# Altium PCB 遥控2.0.PcbDoc
Units mm, origin at the board's own origin, x right, y up, seen from the top; angles counter-clockwise.
Board outline 30 x 35 mm, 2 copper layers (Top Layer, Bottom Layer); 38 components, 17 nets, 107 pads, 20 vias.
Unrouted connection lines stored in the file: 22.
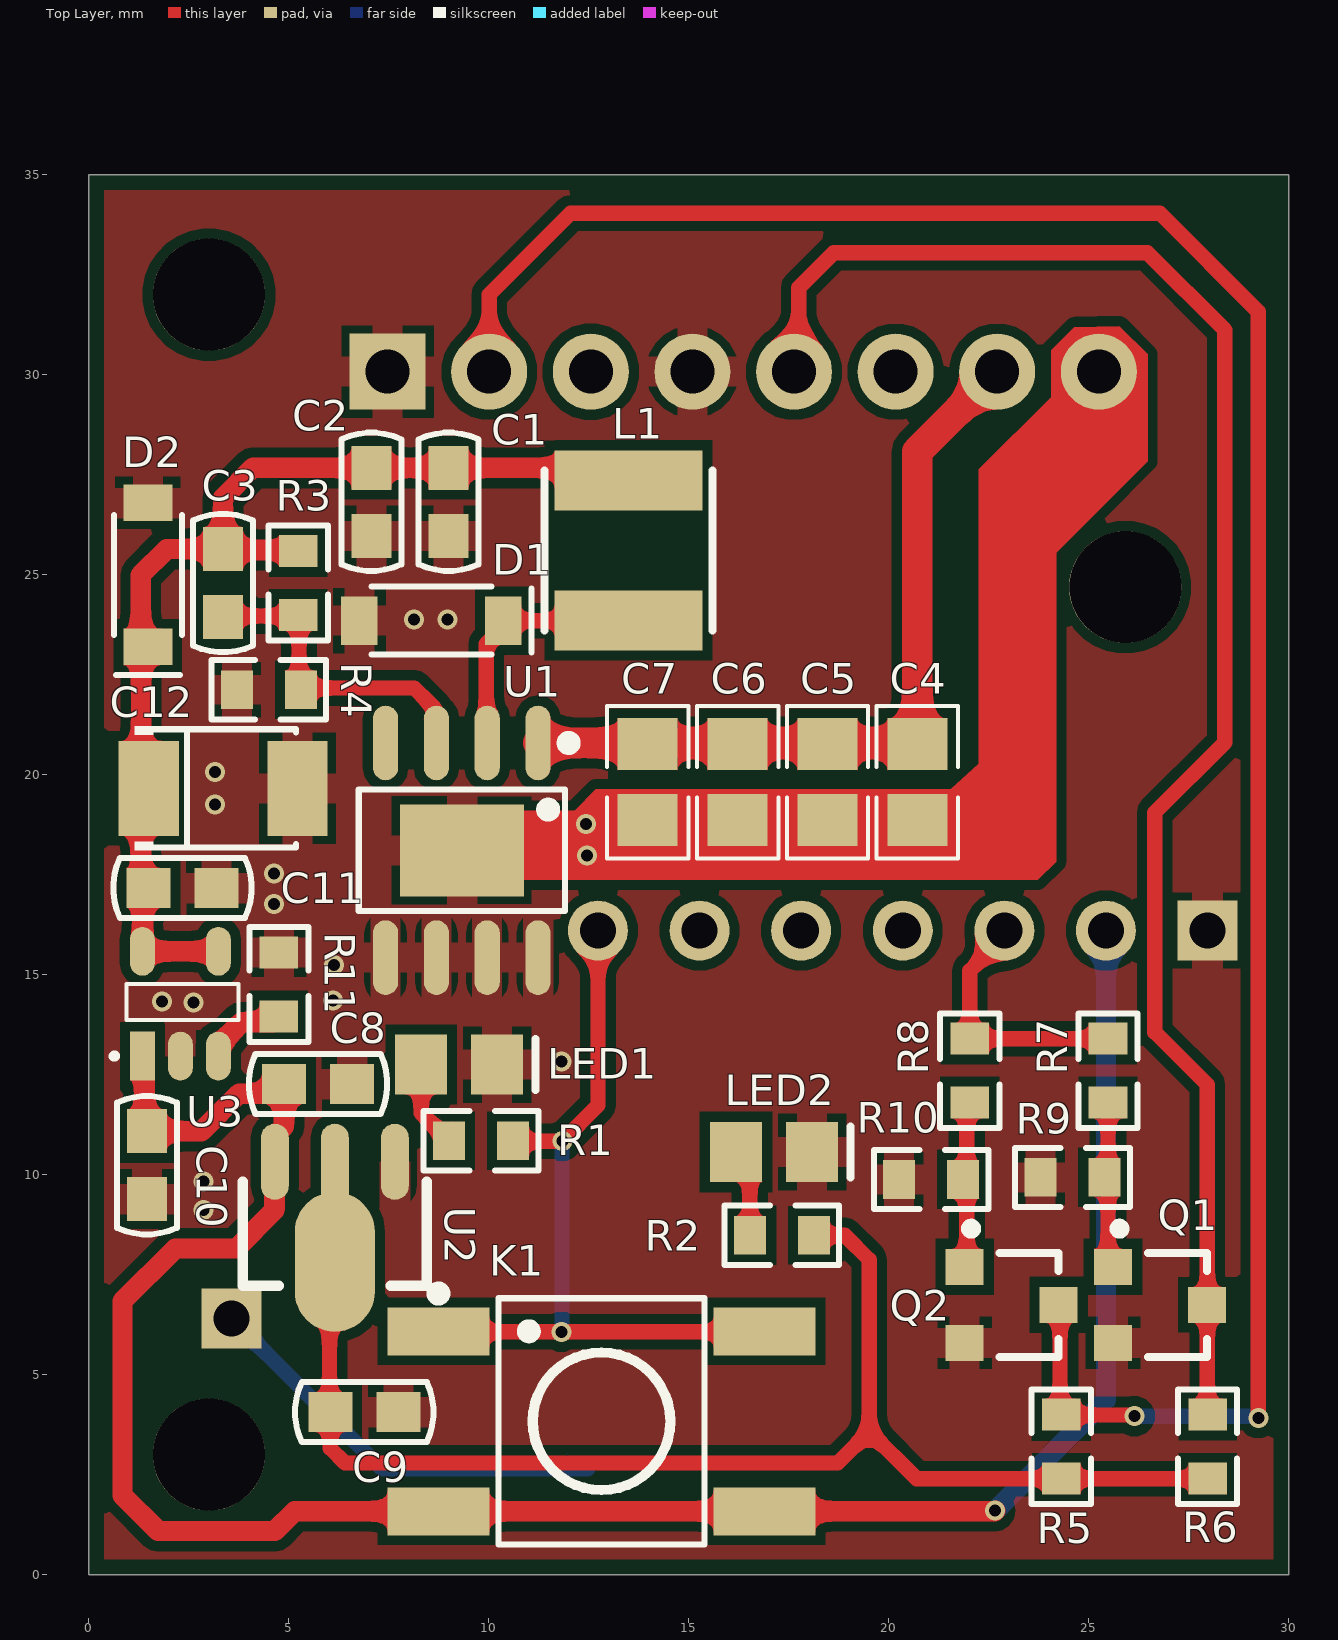
[diagram p0: Top Layer view]
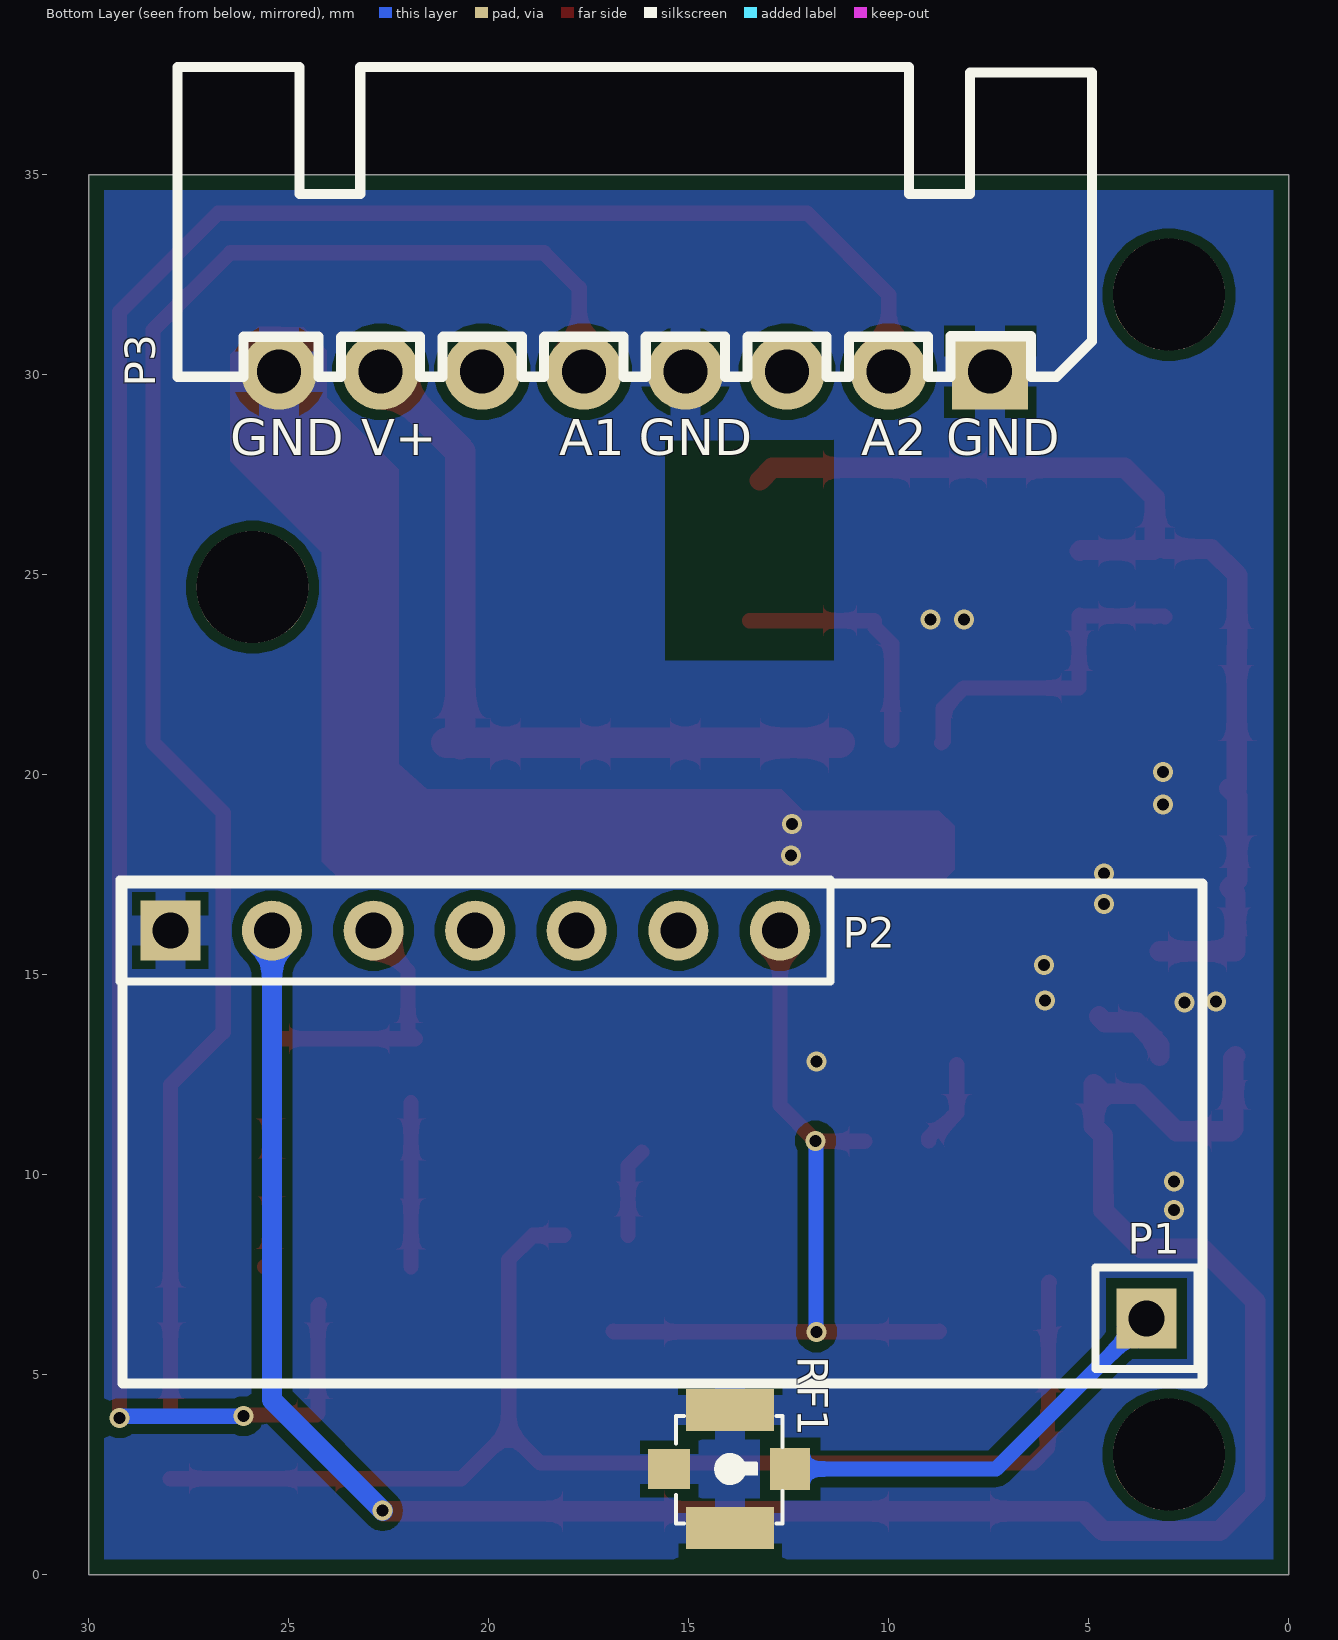
[diagram p1: Bottom Layer view, seen from below]
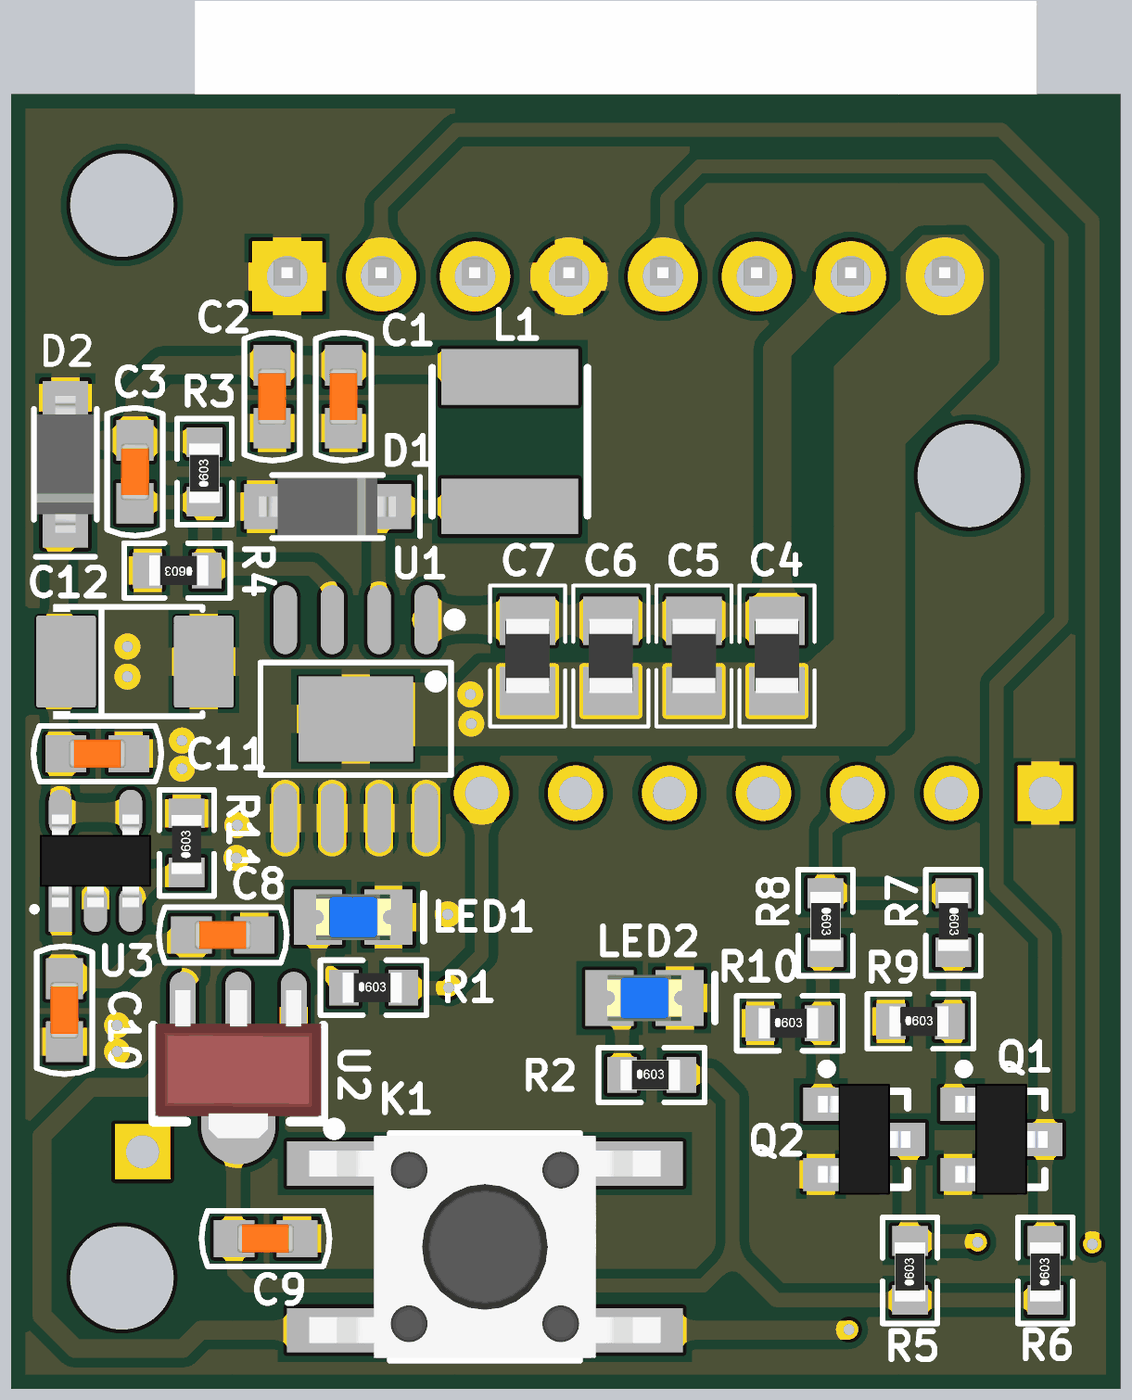
[diagram p2: 3D render of the assembled board from above, using the file's embedded part models]

## Layer stack, top to bottom
Top Solder: solder mask 0.0102, Solder Resist, Dk 3.5
Top Layer: signal copper 0.0356
Dielectric 1: dielectric 0.32, FR-4, Dk 4.8
Bottom Layer: signal copper 0.0356
Bottom Solder: solder mask 0.0102, Solder Resist, Dk 3.5

## Board outline
0,0 0,35 30,35 30,0

## Design rules (kind name [scope] priority, off if disabled: settings)
BoardOutlineClearance [All] p1: gap=0.381 ignorepadtopadclearanceinfootprint=FALSE
Clearance [All] p1: gap=0.254 ignorepadtopadclearanceinfootprint=FALSE except(0: Arc-Hole Track-Hole SMDPad-Hole THPad-Hole Via-Hole Fill-Hole Poly-Hole Region-Hole Text-Hole)
PolygonConnect [All] p1: thpad.connectstyle=Relief thpad.reliefconductorwidth=0.762 thpad.reliefentries=4 thpad.polygonreliefangle="90 Angle" thpad.airgapwidth=0.203 smdpad.connectstyle=Relief smdpad.reliefconductorwidth=0.762 smdpad.reliefentries=4 smdpad.polygonreliefangle="90 Angle" smdpad.airgapwidth=0.203 via.connectstyle=Direct via.reliefconductorwidth=0.762 via.reliefentries=4 via.polygonreliefangle="90 Angle" via.airgapwidth=0.203
RoutingVias [All] p1: holewidth=0.3 width=0.5 viastyle="Through Hole" minholewidth=0.3 minwidth=0.5 maxholewidth=0.3 maxwidth=0.5
SolderMaskExpansion [All] p1: expansion=0.102 istentingtop=FALSE
Width [All] p1: maxlimit=0.762 minlimit=0.254 preferedwidth=0.254
30 further rules are at their usual default settings.

## Components (designator, comment, footprint, x,y, rotation, side; value= is the part's Value field where it differs from the comment)
C1 "1uF" CAP-0603 8.992,26.822 r90 top
C2 "100nF" CAP-0603 7.061,26.822 r90 top
C3 "33nF" CAP-0603 3.353,24.79 r90 top
C4 "10uF" 0805 20.711,19.812 r90 top
C5 "10uF" 0805 18.464,19.812 r90 top
C6 "100nF" 0805 16.217,19.812 r90 top
C7 "10nF" 0805 13.97,19.812 r90 top
C8 "10uF" CAP-0603 5.729,12.268 r180 top
C9 "10uF" CAP-0603 6.883,4.064 r180 top
C10 "10uF" CAP-0603 1.448,10.236 r90 top
C11 "10uF" CAP-0603 2.337,17.17 r180 top
C12 "TAJB107M010RNJ" CASE-B_3528 3.353,19.66 r0 top
D1 "S210" SOD-123 8.56,23.851 r0 top
D2 "BZT52C5V1" SOD-123 1.473,24.994 r270 top
K1 "SW-PB" SW-SMD_4P-L6.0-W6.0 12.814,3.835 r0 top locked
L1 "47uH" IND-SMD_L4.0-W4.0_FNR4012S 13.487,25.603 r270 top
LED1 "LED" LED_0805 9.256,12.751 r0 top locked
LED2 "LED" LED_0805 17.13,10.566 r0 top locked
P1 "Plug" HEADER_1 3.56,6.408 r0 bottom
P2 "Header 7" HDR1X7 27.965,16.104 r180 bottom
P3 "Header 8" XH2.54-W-8P 16.358,30.074 r0 bottom
Q1 "SS8050" SOT-23 26.778,6.746 r270 top
Q2 "SS8050" SOT-23 23.07,6.746 r270 top
R1 "1K" "0603 - duplicate1" 9.804,10.846 r0 top
R2 "1K" "0603 - duplicate1" 17.323,8.484 r0 top
R3 "10K" "0603 - duplicate1" 5.232,24.79 r90 top
R4 "3.3K" "0603 - duplicate1" 4.496,22.123 r180 top
R5 "4.7K" "0603 - duplicate1" 24.308,3.2 r90 top value=10K
R6 "4.7K" "0603 - duplicate1" 27.965,3.2 r90 top value=10K
R7 "1K" "0603 - duplicate1" 25.476,12.598 r270 top value=10K
R8 "1K" "0603 - duplicate1" 22.022,12.598 r270 top value=10K
R9 "10K" "0603 - duplicate1" 24.587,9.931 r0 top
R10 "10K" "0603 - duplicate1" 21.057,9.881 r0 top
R11 "6.8k" "0603 - duplicate1" 4.75,14.757 r90 top
RF1 "6GHz" CONN-SMD_GT-RF1125A-01G 13.981,2.642 r90 bottom
U1 "XL7005A" SOIC-8_L4.9-W3.9-P1.27-LS6.0-BL-EP3.1-1 9.322,18.11 r180 top
U2 "AMS1117-3.3" SOT89 6.147,9.073 r90 top
U3 "SY6280AAC" SOT-23-5 2.286,14.275 r90 top

## Footprints (in the part's own frame and the unit in brackets; to place one, negate y for a bottom-side part, rotate by r counter-clockwise, add the part's x,y. Pads: shape width x height; smd on the part's side, far side on the other; paste and mask are expansions set on the pad)
"0603 - duplicate1" [mm] "贴片带丝印"
  rect 0.8x0.965 smd: 1(-0.8,0) 2(0.8,0)
  silkscreen extent -1.43,-0.74 1.44,0.74, body extent -0.84,-0.41 0.76,0.41, height 0.45
0805 [mm] "贴片带丝印"
  rect 1.3x1.5 smd: 1(-0.95,0) 2(0.95,0)
  silkscreen extent -1.91,-1.02 1.91,1.02, body extent -1,-0.6 1,0.6, height 0.85
CAP-0603 [mm] "贴片电容"
  rect 1.1x1 smd: 1(-0.85,0) 2(0.85,0)
  silkscreen extent -1.73,-0.75 1.73,0.75, body extent -0.76,-0.38 0.76,0.38, height 0.78
CASE-B_3528 [mm]
  rect 1.506x2.376 smd paste+0.051: 1(-1.861,0) 2(1.861,0)
  silkscreen extent -2.21,-1.55 1.83,1.55
CONN-SMD_GT-RF1125A-01G [mm]
  rect 1.05x2.2 smd paste+0 mask+0.05: 1(-1.475,-0.012) 3(1.475,-0.012)
  rect 1x1.05 smd paste+0 mask+0.05: 2(0,1.513)
  rect 1.05x1 smd paste+0 mask+0.05: 4(0,-1.513)
  silkscreen extent -1.36,-1.32 1.33,1.35
HDR1X7 [mm] "Connector; Header; 7 Position"
  rect 1.5x1.5 hole 0.9: 1(0,0)
  round 1.5 hole 0.9: 2(2.54,0) 3(5.08,0) 4(7.62,0) 5(10.16,0) 6(12.7,0) 7(15.24,0)
  silkscreen extent -1.27,-1.27 16.51,1.27
HEADER_1 [mm] "2.54排针-3x1"
  rect 1.5x1.5 hole 0.9: 1(0,0)
  silkscreen extent -1.27,-1.27 1.27,1.27
IND-SMD_L4.0-W4.0_FNR4012S [mm]
  rect 1.5x3.7 smd: 1(-1.75,0) 2(1.75,0)
  silkscreen extent -2,-2.1 2,2.1
LED_0805 [mm] "贴片二极管"
  rect 1.3x1.5 smd: 1(-0.95,0) 2(0.95,0)
  silkscreen extent 1.91,-0.64 1.91,0.64, body extent -1.01,-0.62 1.01,0.62, height 1.1
SOD-123 [mm]
  rect 0.91x1.22 smd: 1(-1.8,0) 2(1.8,0)
  silkscreen extent -1.5,-0.85 2.5,0.85, body extent -1.85,-0.77 1.85,0.78, height 1.18
SOIC-8_L4.9-W3.9-P1.27-LS6.0-BL-EP3.1-1 [mm]
  oval 0.63x1.865 smd: 1(-1.905,-2.683) 2(-0.635,-2.683) 3(0.635,-2.683) 4(1.905,-2.683) 5(1.905,2.682) 6(0.635,2.682) 7(-0.635,2.682) 8(-1.905,2.682)
  rect 3.1x2.3 smd paste+0 mask+0.05: 9(0,0)
  silkscreen extent -2.82,-2.83 2.58,1.52
SOT89 [mm] "SOT89封装"
  oval 1.9x0.7 smd: 1(1.25,-1.5) 3(1.25,1.5)
  oval 3.5x2 smd: 2(-1.25,0)
  oval 2.1x0.7 smd: 2(1.151,0)
  silkscreen extent -1.85,-2.3 0.75,2.3, body extent -2.3,-2.25 1.7,2.25, height 1.5
SOT-23 [mm]
  rect 0.9x0.95 smd: 1(-0.95,-1.175) 2(0.95,-1.175) 3(0,1.175)
  silkscreen extent -2.03,-1.14 1.3,1.18, body extent -1.5,-1.25 1.5,1.25, height 1.15
SOT-23-5 [mm] "SOT23封装-5引脚贴片"
  rect 1.22x0.62 smd: 1(-1.31,0.95)
  oval 1.22x0.62 smd: 2(-1.31,0) 3(-1.31,-0.95) 4(1.31,-0.95) 5(1.31,0.95)
  silkscreen extent -1.32,-1.45 0.49,1.66, body extent -1.25,-1.5 1.25,1.5, height 1.08
SW-SMD_4P-L6.0-W6.0 [mm]
  rect 2.55x1.2 smd: 1(-4.075,2.25) 1(4.075,2.25) 2(-4.075,-2.25) 2(4.075,-2.25)
  silkscreen extent -4.22,-3.08 2.57,3.34, body extent -4.75,-3 4.75,3, height 7.42
XH2.54-W-8P [mm] "接插件，8P"
  rect 1.9x1.9 hole 1.1: 1(-8.89,0)
  round 1.9 hole 1.1: 2(-6.35,0) 3(-3.81,0) 4(-1.27,0) 5(1.27,0) 6(3.81,0) 7(6.35,0) 8(8.89,0)
  silkscreen extent -11.43,-7.62 11.43,0.13, body extent -11.4,-7.45 11.38,0.25, height 2.89

## Part data
C1 C2 C3 C4 C5 C6 C7 C8 C9 C10 C11: library part Cap, "无极性电容", LatestRevisionDate=17-Jul-2002, LatestRevisionNote="Re-released for DXP Platform.", PackageReference=RAD-0.3, Published=8-Jun-2000, Publisher="Altium Limited"
C12: library part JVJ10V100M5X5, "100uF", Symbol=100uf
D1: library part B340A, LCSC Assembly=Yes, Manufacturer=MDD, image=//image.lceda.cn/szlcsc/C64982.jpg, Manufacturer Part=B340A, SMT Type=Extend, spicePre=D, spiceSymbolName=B340A, Supplier=LCSC, Supplier Part=C64982
D2: library part "D Zener", "Zener Diode", LatestRevisionDate=17-Jul-2002, LatestRevisionNote="Re-released for DXP Platform.", PackageDescription="Diode, Thru-Hole; 2 Leads; 0.7 in Pin Spacing", PackageReference=DIODE-0.7, Published=8-Jun-2000, Publisher="Altium Limited"
K1: "微动开关", LatestRevisionDate=17-Jul-2002, LatestRevisionNote="Re-released for DXP Platform.", PackageReference=SPST-2, Published=24-Mar-1999, Publisher="Altium Limited", Suppliter Part=C961737
L1: library part 68uH, Manufacturer=SXN, Manufacturer Part=SMDRI127-680MT, nameAlias=Inductance, spicePre=L, spiceSymbolName=SMDRI127-680MT, Supplier=LCSC, Supplier Part=C9907
LED1 LED2: "发光二极管", LatestRevisionDate=08-Jul-2005, LatestRevisionNote="Mech Layer 1 removed.", PackageReference=LED-0, Published=8-Jun-2000, Publisher="Altium Limited"
P1: "安装孔", LatestRevisionDate=17-Jul-2002, LatestRevisionNote="Re-released for DXP Platform.", Publisher="Altium Limited"
P2: "Header, 7-Pin", LatestRevisionDate=17-Jul-2002, LatestRevisionNote="Re-released for DXP Platform.", Publisher="Altium Limited"
P3: "Header, 8-Pin", LatestRevisionDate=17-Jul-2002, LatestRevisionNote="Re-released for DXP Platform.", Publisher="Altium Limited"
Q1 Q2: "NPN贴片三极管", PackageDocument=Sep-1998, Code_JEDEC=TO-92A, ComponentLink1Description="Manufacturer Link", ComponentLink1URL=http://www.fairchildsemi.com/, ComponentLink2Description=Datasheet, ComponentLink2URL=http://www.fairchildsemi.com/ds/2N%2F2N3904.pdf, DatasheetDocument=1997, LatestRevisionDate=15-Jan-2003, LatestRevisionNote="PCB Footprint 'BCY-W3/D4.7' replaced", PackageReference=TO-92A, Published=8-Jun-2000, Publisher="Altium Limited"
R1 R2 R5 R6 R7 R8 R9 R10: library part Res, "贴片电阻", LatestRevisionDate=17-Jul-2002, LatestRevisionNote="Re-released for DXP Platform.", PackageReference=AXIAL-0.4, Published=8-Jun-2000, Publisher="Altium Limited"
R3: library part 1K, LCSC Assembly=Yes, Manufacturer=UniOhm, Manufacturer Part=0603WAF1001T5E, nameAlias="Resistance (Ohms)", SMT Type=Basic, spicePre=R, spiceSymbolName=0603WAF1001T5E, Supplier=LCSC, Supplier Part=C21190
R4 R11: library part 3K, LCSC Assembly=Yes, Manufacturer=UniOhm, Manufacturer Part=0603WAF3001T5E, nameAlias="Resistance (Ohms)", SMT Type=Basic, spicePre=R, spiceSymbolName=0603WAF3001T5E, Supplier=LCSC, Supplier Part=C4211
RF1: library part GT-RF1125A-01G, JLCPCB Part Class="Extended Part", LCSC Part Name="内针 IPEX 立贴", Manufacturer=G-Switch(品赞), Operating Temperature Range=-40℃~+90℃, Add into BOM=yes, Connector Type=板端, Convert to PCB=yes, Datasheet=https://atta.szlcsc.com/upload/public/pdf/source/20240806/E29158DC2BBCFBE0FBB4FF318E1913A6.pdf, Device=GT-RF1125A-01G, Impedance=20mΩ, Interface=内针, Interface Diameter=2mm, Interface Length/Height=1.25mm, Manufacturer Part=GT-RF1125A-01G, Number of Ports=1, RF Series=IPEX, Style=立贴, Supplier=LCSC, Supplier Footprint=SMD, Supplier Part=C5299419, Symbol=GT-RF1125A-01G
U1: Frequency - Switching=150kHz, JLCPCB Part Class="Extended Part", LCSC Part Name="0.4A 150kHz 80V 降压型DC-DC转换器", Manufacturer=XLSEMI(芯龙), Operating Temperature=-40℃~+125℃@(TJ), Output Current=400mA, Output Voltage=1.25V~20V, Quiescent Current=2.5mA, Voltage - Supply=5V~80V, Add into BOM=yes, Convert to PCB=yes, Datasheet=https://atta.szlcsc.com/upload/public/pdf/source/20150821/1457707346919.pdf, Device=XL7005A, Function=降压型, Manufacturer Part=XL7005A, Number of Outputs=1, Output Type=可调, Supplier=LCSC, Supplier Footprint=SOIC-8-EP, Supplier Part=C50848, Switch tube (built-in/external)=内置, Symbol=XL7005A, Synchronous Rectifier=否, Topology=降压式
U2: library part AMS1117, "3.3V稳压芯片"
U3: Symbol=SY6280AAC

## Free pads (board coordinates)
  round 2.8 hole 2.8 unplated: 0(3,3) 0(3,32) 0(25.908,24.689)

## Via types
v1: diameter 0.5, hole 0.3, Top Layer to Bottom Layer, 20 vias

## Nets (pads, with @x,y where several pads share a name; then routed paths per layer and width w, separated by ;. In a path a pad name is that pad's centre, name@x,y a point inside that pad or via, vN(x,y) a via of type N, cw(c..) or ccw(c..) an arc to the next point about the centre after c; other vN are vias at no path point)
+3.3V: C9.2 R2.2 R5.1 R6.1 U2.2 | length 33
  Top Layer w0.381: U2.2@5.995,7.31 6.014,7.291 6.014,4.083 C9.2 6.033,3.161 6.401,2.794 18.72,2.794 19.507,3.581 ; R2.2 18.898,8.484 19.507,7.874 19.507,3.581 ; R6.1 20.688,2.4 19.507,3.581
+5V: C1.2 C2.2 C3.2 C11.2 C12.1 D2.2 L1.1 R3.2 U3.4 U3.5 | length 27.1
  Top Layer w0.508: C12.1@1.314,19.66 1.305,19.669 1.305,23.184 1.295,23.194 1.295,24.994 1.942,25.64 C3.2@3.099,25.64 ; C12.1 1.295,19.463 1.295,17.362 C11.2 1.336,17.02 U3.5 U3.4 ; R3.2 5.207,25.615 3.378,25.615 C3.2 3.353,26.924 4.101,27.672 C2.2 C1.2 12.914,27.672 L1.1@13.233,27.353
+5VIN: C8.2 C10.2 K1.2 P2.2 U2.3 U3.1 | length 56.7
  Top Layer w0.508: U3.1 1.392,12.909 1.392,11.142 C10.2 2.814,11.086 3.75,12.022 4.633,12.022 C8.2 4.879,11.206 4.647,10.975 U2.3 4.639,10.315 4.639,9.109 3.683,8.153 2.159,8.153 0.838,6.833 0.838,1.981 1.727,1.092 4.649,1.092 5.143,1.585 8.739,1.585 16.889,1.585 22.642,1.585 v1(22.657,1.6)
  Bottom Layer w0.508: v1(22.657,1.6) 25.425,4.369 P2.2
A1: P3.5 Q1.3 R6.2 | length 42.3
  Top Layer w0.381: P3.5 17.744,30.19 17.744,32.171 18.618,33.045 26.467,33.045 28.397,31.115 28.397,20.803 26.645,19.05 26.645,13.564 27.959,12.249 27.959,6.746 27.959,4.007 R6.2
A2: P3.2 Q2.3 R5.2 | length 58.4
  Top Layer w0.381: P3.2 10.008,32.004 12.04,34.036 26.772,34.036 29.235,31.572 v1(29.235,3.912) ; Q2.3 24.276,6.715 24.276,4.032 R5.2 24.316,3.992 26.075,3.992 26.104,3.962 v1(26.137,3.962)
  Bottom Layer w0.381: v1@26.187,3.962 29.152,3.962 29.203,3.912 v1(29.235,3.912)
ANT: P1.1 RF1.4 | length 10.5
  Bottom Layer w0.381: P1.1 7.326,2.642 RF1.4
D0_5V: P2.3 R7.1 R8.1 | length 6.6
  Top Layer w0.381: R8.1@21.933,13.487 21.844,13.398 R8.1 ; P2.3 22.885,15.962 22.022,15.098 R8.1 ; R7.1@25.222,13.398 R8.1
GND: C1.1 C2.1 C4.1 C5.1 C6.1 C7.1 C8.1 C9.1 C10.1 C11.1 C12.2 D1.1 D2.1 LED1.2 LED2.2 P2.1 P3.1 P3.4 P3.8 Q1.2 Q2.2 R4.2 R9.1 R10.1 R11.2 RF1.1 RF1.2 RF1.3 U1.5 U1.6 U1.7 U1.8 U1.9 U2.1 U3.2
  other v1: 2.87,9.119 2.87,9.83 11.811,12.827 2.616,14.3 1.829,14.326 6.096,14.351 6.121,15.24 4.623,16.764 4.623,17.526 12.446,17.983 12.421,18.771 3.15,19.253 3.15,20.066 8.128,23.876 8.966,23.876
NetC3_1: C3.1 R3.1 R4.1 U1.3 | length 8.5
  Top Layer w0.381: C3.1@3.099,23.94 3.124,23.965 C3.1@3.353,23.965 ; C3.1 3.378,23.965 5.016,23.965 5.207,23.965 R3.1 ; R3.1@5.251,23.972 5.251,22.17 8.132,22.17 8.639,21.663 8.639,20.84 U1.3
NetD1_2: D1.2 L1.2 U1.2 | length 6.3
  Top Layer w0.381: U1.2@9.931,20.856 9.931,23.267 10.36,23.696 D1.2 13.485,23.851 L1.2
NetLED1_1: LED1.1 R1.1 | length 2.2
  Top Layer w0.381: LED1.1 8.306,11.544 8.712,11.138 8.795,11.138 9.004,10.928 R1.1
NetLED2_1: LED2.1 R2.1 | length 2.2
  Top Layer w0.381: LED2.1 16.523,10.223 R2.1
NetQ1_1: Q1.1 R7.2 R9.2 | length 4.2
  Top Layer w0.381: R7.2 25.476,10.02 R9.2 25.476,9.842 25.476,7.823 Q1.1
NetQ2_1: Q2.1 R8.2 R10.2 | length 4.1
  Top Layer w0.381: Q2.1@21.946,7.696 R8.2@21.946,11.798
NetR11_1: R11.1 U3.3 | length 2.1
  Top Layer w0.508: U3.3 3.236,13.234 3.813,13.811 4.604,13.811 R11.1
V+: C4.2 C5.2 C6.2 C7.2 P3.7 U1.1 | length 20
  Top Layer w0.762: U1.1 14.046,20.793 16.293,20.793 18.54,20.793 C4.2@21.071,20.793 ; C4.2 20.711,28.077 P3.7
VT: K1.1 P2.7 R1.2 | length 19.8
  Top Layer w0.381: K1.1@8.739,6.085 8.754,6.071 v1(11.811,6.071) 16.875,6.071 K1.1@16.889,6.085 ; R1.2@10.604,10.833 11.824,10.833 v1(11.836,10.846) 12.725,11.735 P2.7
  Bottom Layer w0.381: v1(11.811,6.071) 11.824,6.083 11.824,10.801 v1@11.836,10.814 ; v1@11.824,10.858 v1(11.836,10.846)
pads on no net: P2.4 P2.5 P2.6 P3.3 P3.6 U1.4

## Polygon pours and split planes (outlines as drawn)
GND on Bottom Layer "GND_L02_P001" (solid, remove dead copper, pour order 1): -0.686,-1.803 30.632,-1.803 30.836,-1.6 30.836,36.144 -0.457,36.144 -1.778,34.823
GND on Top Layer "GND_L01_P000" (solid, remove dead copper, pour order 0): -1.676,-2.083 -0.584,-0.991 31.217,-0.991 31.217,34.442 28.473,37.186 27.33,36.043 -0.787,36.043

## Other copper
Top Layer:
  region net GND: 8.611,17.374 8.357,17.628 8.357,18.72 8.738,19.101 12.141,19.101 12.675,19.634 21.539,19.634 22.25,20.269 22.25,27.635 24.054,29.439 24.054,30.607 24.635,31.189 25.761,31.211 26.467,30.505 26.467,27.838 24.181,25.552 24.181,23.876 24.181,17.82 23.719,17.374
  pour cut-out: 11.383,28.357 11.383,22.849 15.591,22.849 15.591,28.357
Bottom Layer:
  pour cut-out: 11.379,28.372 11.379,22.86 15.596,22.86 15.596,28.321 15.57,28.346

## Silkscreen, mask and mechanical layers (free items; w line width, h text height)
Bottom Overlay:
  lines w0.254: 2.159,4.778 2.159,17.278 29.159,17.278 29.159,4.778 2.159,4.778
  text "GND" at 8.562,27.988 h0.9
  text "A2" at 10.696,27.988 h0.9
  text "GND" at 16.258,27.988 h0.9
  text "A1" at 18.24,27.988 h0.9
  text "V+" at 23.193,27.988 h0.9
  text "GND" at 26.469,27.988 h0.9
Mechanical 1:
  the board outline again, w0.508